# Altium PCB WiFi时钟.PcbDoc
Units mm, origin at the board's own origin, x right, y up, seen from the top; angles counter-clockwise.
Board outline 29.97 x 29.97 mm, 2 copper layers (Top Layer, Bottom Layer); 11 components, 10 nets, 61 pads, 13 vias.
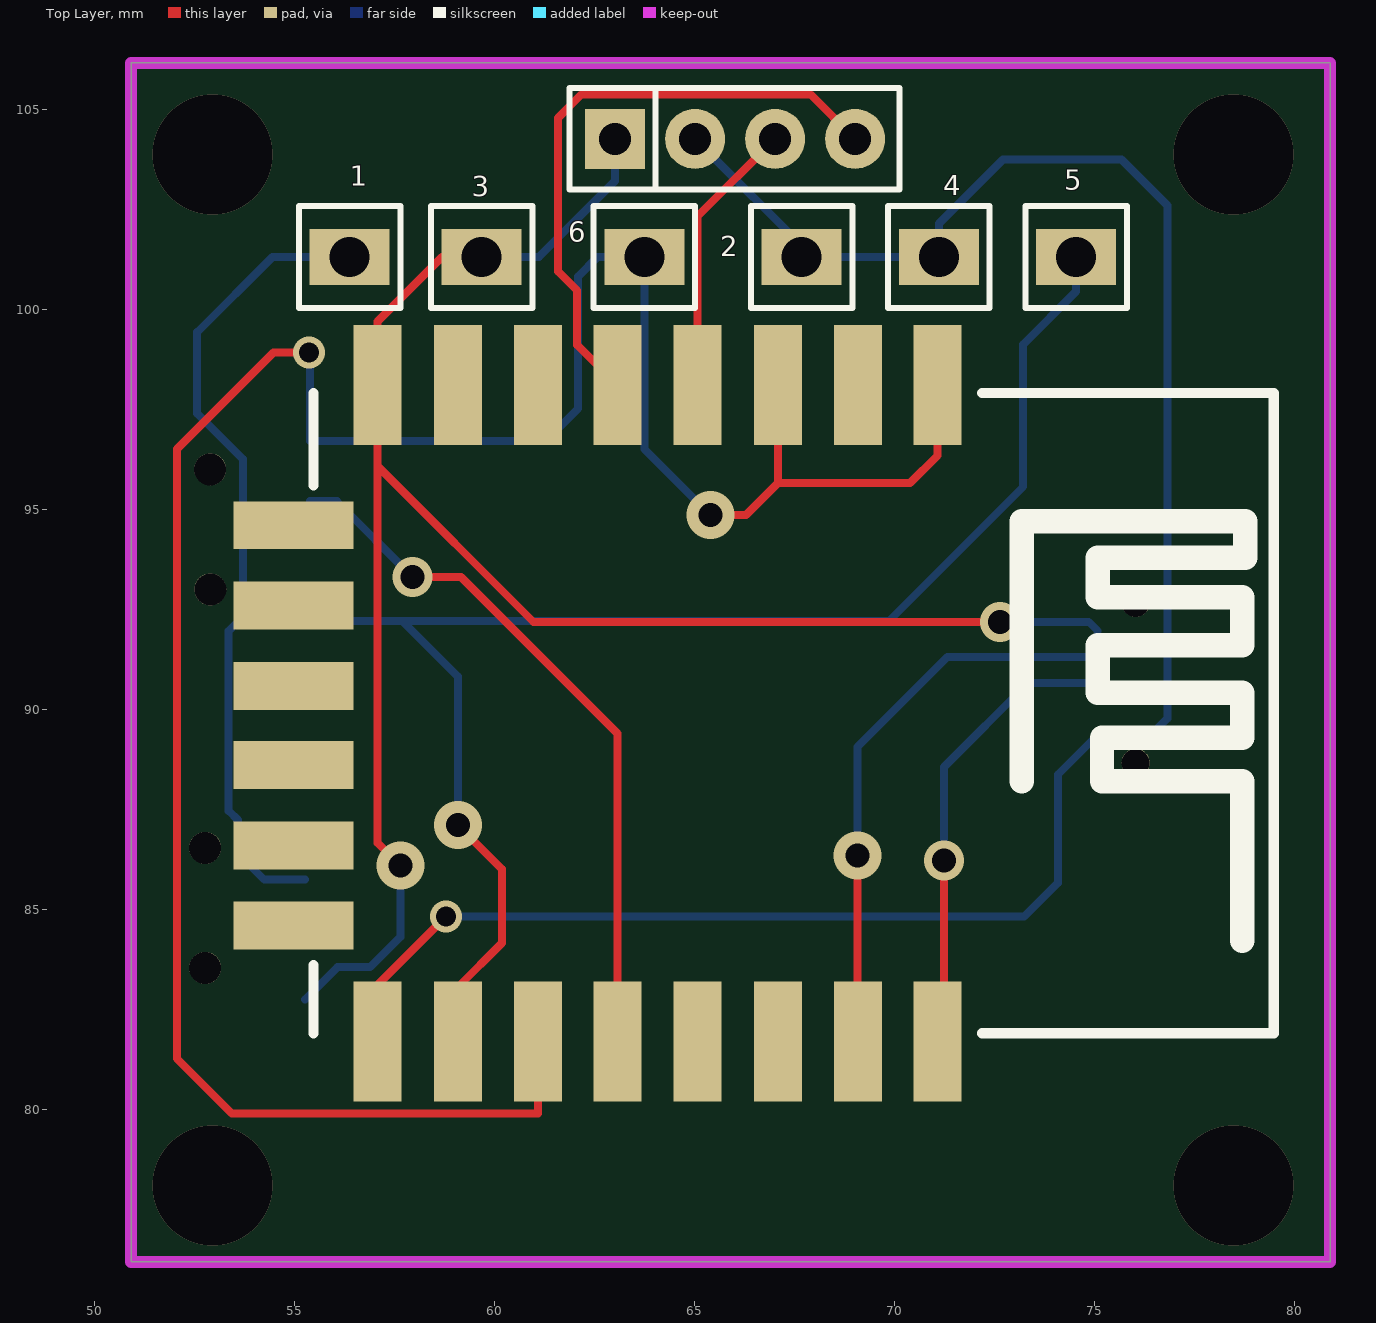
[diagram p0: Top Layer view]
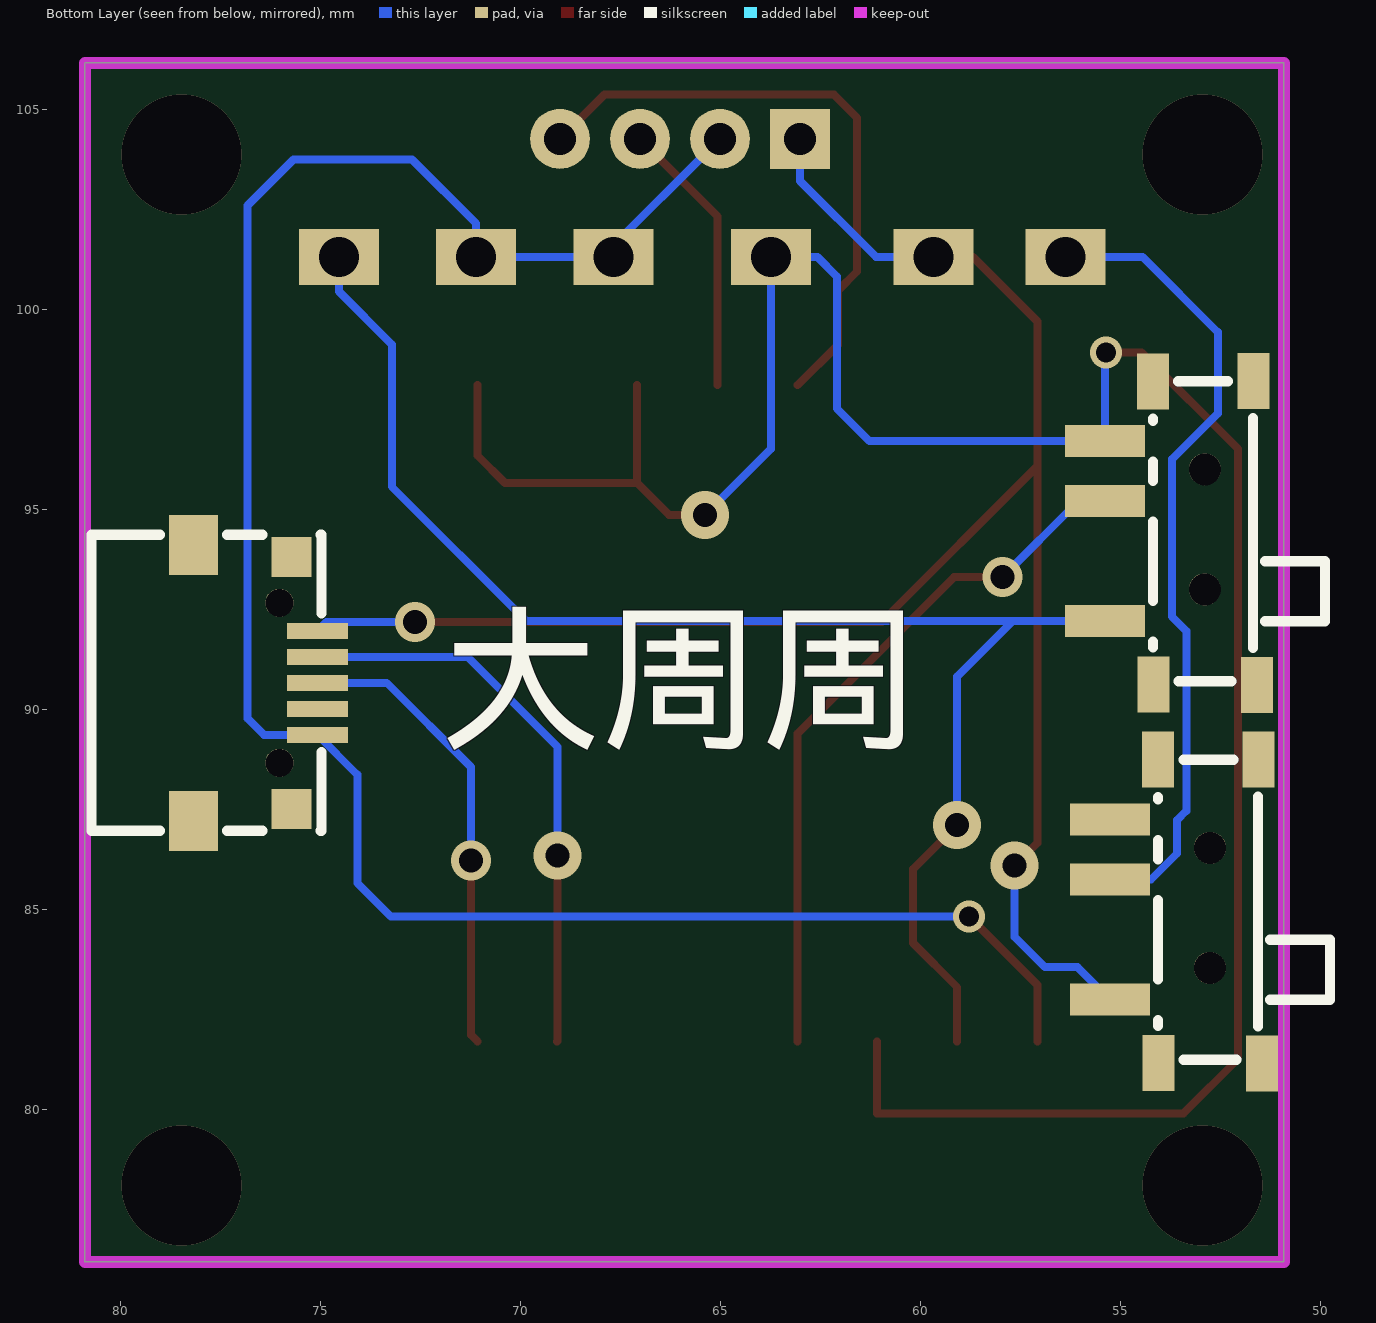
[diagram p1: Bottom Layer view, seen from below]

## Layer stack, top to bottom
Top Solder: solder mask 0.0102, Solder Resist, Dk 3.5
Top Layer: signal copper 0.0356
Dielectric 1: dielectric 0.32, FR-4, Dk 4.8
Bottom Layer: signal copper 0.0356
Bottom Solder: solder mask 0.0102, Solder Resist, Dk 3.5

## Board outline
50.927,76.2 50.927,106.172 80.899,106.172 80.899,76.2

## Design rules (kind name [scope] priority, off if disabled: settings)
Clearance [All] p1: gap=0.2
PolygonConnect [All] p1: connectstyle=Relief reliefconductorwidth=0.254 reliefentries=4 polygonreliefangle="90 Angle" airgapwidth=0.254
RoutingVias [All] p1: holewidth=0.6 width=1 viastyle="Through Hole" minholewidth=0.711 minwidth=1.27 maxholewidth=0.711 maxwidth=1.27
SolderMaskExpansion [All] p1: expansion=0.102
Width [All] p1: maxlimit=0.2 minlimit=0.2 preferedwidth=0.2
30 further rules are at their usual default settings.

## Classes and differential pairs
component class Sheet1: 1 2 3 5 6 " " "  "

## Components (designator, comment, footprint, x,y, rotation, side; value= is the part's Value field where it differs from the comment)
1 "SIP1" SIP1 157.988,50.52 r90 top
2 "SIP1" SIP1 169.291,50.52 r90 top
3 "SIP1" SIP1 161.29,50.52 r90 top
4 "SIP1" SIP1 172.72,50.52 r90 top
5 "SIP1" SIP1 176.149,50.52 r90 top
6 "SIP1" SIP1 165.354,50.52 r90 top
J1 "SIP4" SIP4-2.0 63.024,104.275 r180 top
KEY1 "MSK-11027 Toggle Switches" SW-SMD_MSK-11027 52.959,84.963 r90 bottom
KEY2 "MSK-11027 Toggle Switches" SW-SMD_MSK-11027 53.086,94.425 r90 bottom
U11 "ESP12ESMD" ESP12E-SMD 66.548,89.916 r270 top
USB1 "MICRO QTZB5.5" MICRO-USB-SMD_MICRO-QTZB5.5 77.597,90.678 r270 bottom

## Footprints (in the part's own frame and the unit in brackets; to place one, negate y for a bottom-side part, rotate by r counter-clockwise, add the part's x,y. Pads: shape width x height; smd on the part's side, far side on the other; paste and mask are expansions set on the pad)
ESP12E-SMD [mm]
  rect 3x1.199 smd: 1(-8.204,4.535) 2(-8.204,2.553) 3(-8.204,0.547) 4(-8.204,-1.46) 5(-8.204,-3.466) 6(-8.204,-5.448) 7(-8.204,-7.454) 8(-8.204,-9.461) 9(8.204,-9.461) 10(8.204,-7.454) 11(8.204,-5.448) 12(8.204,-3.466) 13(8.204,-1.46) 14(8.204,0.547) 15(8.204,2.553) 16(8.204,4.535)
  rect 1.199x3 smd: A(-4.7,-11.569) B(-2.693,-11.569) C(-0.686,-11.569) D(1.295,-11.569) E(3.301,-11.569) F(5.308,-11.569)
  silkscreen extent -8,-11.06 8,12.94
MICRO-USB-SMD_MICRO-QTZB5.5 [mm]
  rect 0.4x1.524 smd: 1(-1.3,2.507) 2(-0.65,2.507) 3(0,2.507) 4(0.65,2.507) 5(1.3,2.507)
  rect 1.5x1.22 smd: 6(-3.45,-0.592) 7(3.45,-0.593)
  rect 1x1 smd: 6(-3.15,1.858) 7(3.15,1.858)
  round 0.7 hole 0.7 unplated: ""(-2,1.558) ""(2,1.558)
  silkscreen extent -3.7,-3.14 3.7,2.61
SIP1 [mm]
  rect 1.4x2 hole 1: 1(50.8,101.6)
  silkscreen extent 49.53,100.33 52.08,102.87, body extent 49.52,100.33 52.06,102.87, height 8.89
SIP4-2.0 [mm]
  rect 1.5x1.5 hole 0.8: 1(0,0)
  round 1.5 hole 0.8: 2(-2,0) 3(-4,0) 4(-6,0)
  silkscreen extent -7.11,-1.27 1.14,1.27
SW-SMD_MSK-11027 [mm]
  rect 0.8x2 smd: 1(-2.209,2.314) 2(0.791,2.314) 3(2.291,2.314)
  rect 1.4x0.8 smd: 4(-3.793,1.104) 5(3.79,1.112) 6(3.802,-1.397) 7(-3.802,-1.483)
  round 0.8 hole 0.8 unplated: ""(-1.413,-0.181) ""(1.589,-0.184)
  silkscreen extent -3.71,-3.19 3.79,1.11

## Part data
1 2 3 4 5 6: "Variable Resistor"
J1: "jointbar"

## Via types
v1: diameter 1.2, hole 0.6, Top Layer to Bottom Layer, 4 vias
v2: diameter 3, hole 3, Top Layer to Bottom Layer, 4 vias
v3: diameter 1, hole 0.6, Top Layer to Bottom Layer, 3 vias
v4: diameter 0.8, hole 0.5, Top Layer to Bottom Layer, 2 vias

## Nets (pads, with @x,y where several pads share a name; then routed paths per layer and width w, separated by ;. In a path a pad name is that pad's centre, name@x,y a point inside that pad or via, vN(x,y) a via of type N, cw(c..) or ccw(c..) an arc to the next point about the centre after c; other vN are vias at no path point)
Net1_1: 1.1 KEY1.2 | length 20.3
  Bottom Layer w0.2: KEY1.2 54.254,85.754 53.594,86.414 53.594,87.249 53.365,87.478 53.365,91.973 53.721,92.329 53.721,96.266 52.578,97.409 52.578,99.441 54.458,101.32 1.1
Net2_1: 2.1 4.1 J1.2 U11.9 USB1.5 | length 53.6
  Top Layer w0.2: U11.9 57.087,83.122 v4(58.801,84.836)
  Bottom Layer w0.2: v4(58.801,84.836) 73.254,84.836 74.092,85.674 74.092,88.38 USB1.5 76.424,89.378 76.835,89.789 76.835,102.61 75.686,103.759 72.72,103.759 71.12,102.159 4.1 2.1@67.978,101.32 ; J1.2 2.1@67.978,101.32 ; 2.1 2.1@67.978,101.32
Net3_1: 3.1 J1.1 KEY1.1 U11.8 USB1.1 | length 46.8
  Top Layer w0.2: v1(57.658,86.106) 57.087,86.677 57.087,96.094 ; 3.1 58.699,101.32 57.087,99.708 U11.8 57.087,96.094 ; v3(72.644,92.202) 60.979,92.202 57.087,96.094
  Bottom Layer w0.2: KEY1.1 56.085,83.566 56.896,83.566 57.658,84.328 v1(57.658,86.106) ; 3.1 61.119,101.32 63.024,103.226 J1.1 ; v3(72.644,92.202) 74.866,92.202 USB1.1
Net5_1: 5.1 KEY2.1 U11.10 | length 37.5
  Top Layer w0.2: U11.10 59.094,83.065 60.198,84.169 60.198,86.018 v1(59.094,87.122)
  Bottom Layer w0.2: KEY2.1 57.709,92.216 ; v1(59.094,87.122) 59.094,90.831 57.709,92.216 ; 5.1 74.549,100.457 73.228,99.136 73.228,95.58 69.864,92.216 57.709,92.216
Net6_1: 6.1 KEY2.3 U11.1 U11.3 U11.11 | length 63
  Top Layer w0.2: v4(55.372,98.933) 54.483,98.933 52.07,96.52 52.07,81.28 53.442,79.908 61.1,79.908 U11.11 ; v1(65.405,94.869) 66.294,94.869 67.095,95.67 ; U11.3 67.095,95.67 ; U11.1 71.083,96.356 70.397,95.67 67.095,95.67
  Bottom Layer w0.2: v4(55.372,98.933) 55.4,98.905 KEY2.3 61.283,96.716 62.103,97.536 62.103,100.838 62.586,101.32 6.1 63.754,96.52 v1(65.405,94.869)
NetJ1_3: J1.3 U11.4 | length 7
  Top Layer w0.2: U11.4 65.088,102.339 J1.3
NetJ1_4: J1.4 U11.5 | length 15.4
  Top Layer w0.2: U11.5 62.078,99.124 62.078,100.482 61.595,100.965 61.595,104.8 62.179,105.385 67.914,105.385 J1.4
NetKEY2_2: KEY2.2 U11.12 | length 17.8
  Top Layer w0.2: v3(57.963,93.32) 59.17,93.32 63.082,89.408 U11.12
  Bottom Layer w0.2: KEY2.2 56.066,95.216 v3(57.963,93.32)
NetU11_15: U11.15 USB1.2 | length 14.3
  Top Layer w0.2: v1(69.088,86.36) 69.088,81.726 U11.15
  Bottom Layer w0.2: v1(69.088,86.36) 69.088,89.078 71.338,91.328 USB1.2
NetU11_16: U11.16 USB1.3 | length 11.6
  Top Layer w0.2: U11.16 71.247,81.877 v3(71.247,86.233)
  Bottom Layer w0.2: v3(71.247,86.233) 71.247,88.57 73.355,90.678 USB1.3
pads on no net: KEY1. KEY1.3 KEY1.4 KEY1.5 KEY1.6 KEY1.7 KEY2. KEY2.4 KEY2.5 KEY2.6 KEY2.7 U11.2 U11.6 U11.7 U11.13 U11.14 U11.A U11.B U11.C U11.D U11.E U11.F USB1. USB1.4 USB1.6 USB1.7
copper on no net:
  other v2: 52.959,78.105 78.486,78.105 52.959,103.886 78.486,103.886

## Keep-outs
Keep-Out Layer:
  the board outline again, w0.3

## Silkscreen, mask and mechanical layers (free items; w line width, h text height)
Drill Drawing:
  text "Drill Drawing." at 84.88,78.74 h1.52
  text ".LEGEND" at 94.532,76.327 h1.52

## Dimensions
50.927,76.2 to 80.899,76.2 on Mechanical 1
50.927,76.2 to 50.927,106.172 on Mechanical 1

## Text inside footprints (layer, text, board x,y; h text height)
U11: Bottom Overlay "大周周" at 72.009,88.392 h5